# Altium PCB IowaStateLED.PcbDoc
Units mil, origin at the board's own origin, x right, y up, seen from the top; angles counter-clockwise.
Board outline 4580 x 3115 mil, 2 copper layers (Top Layer, Bottom Layer); 178 components, 106 nets, 374 pads, 35 vias.
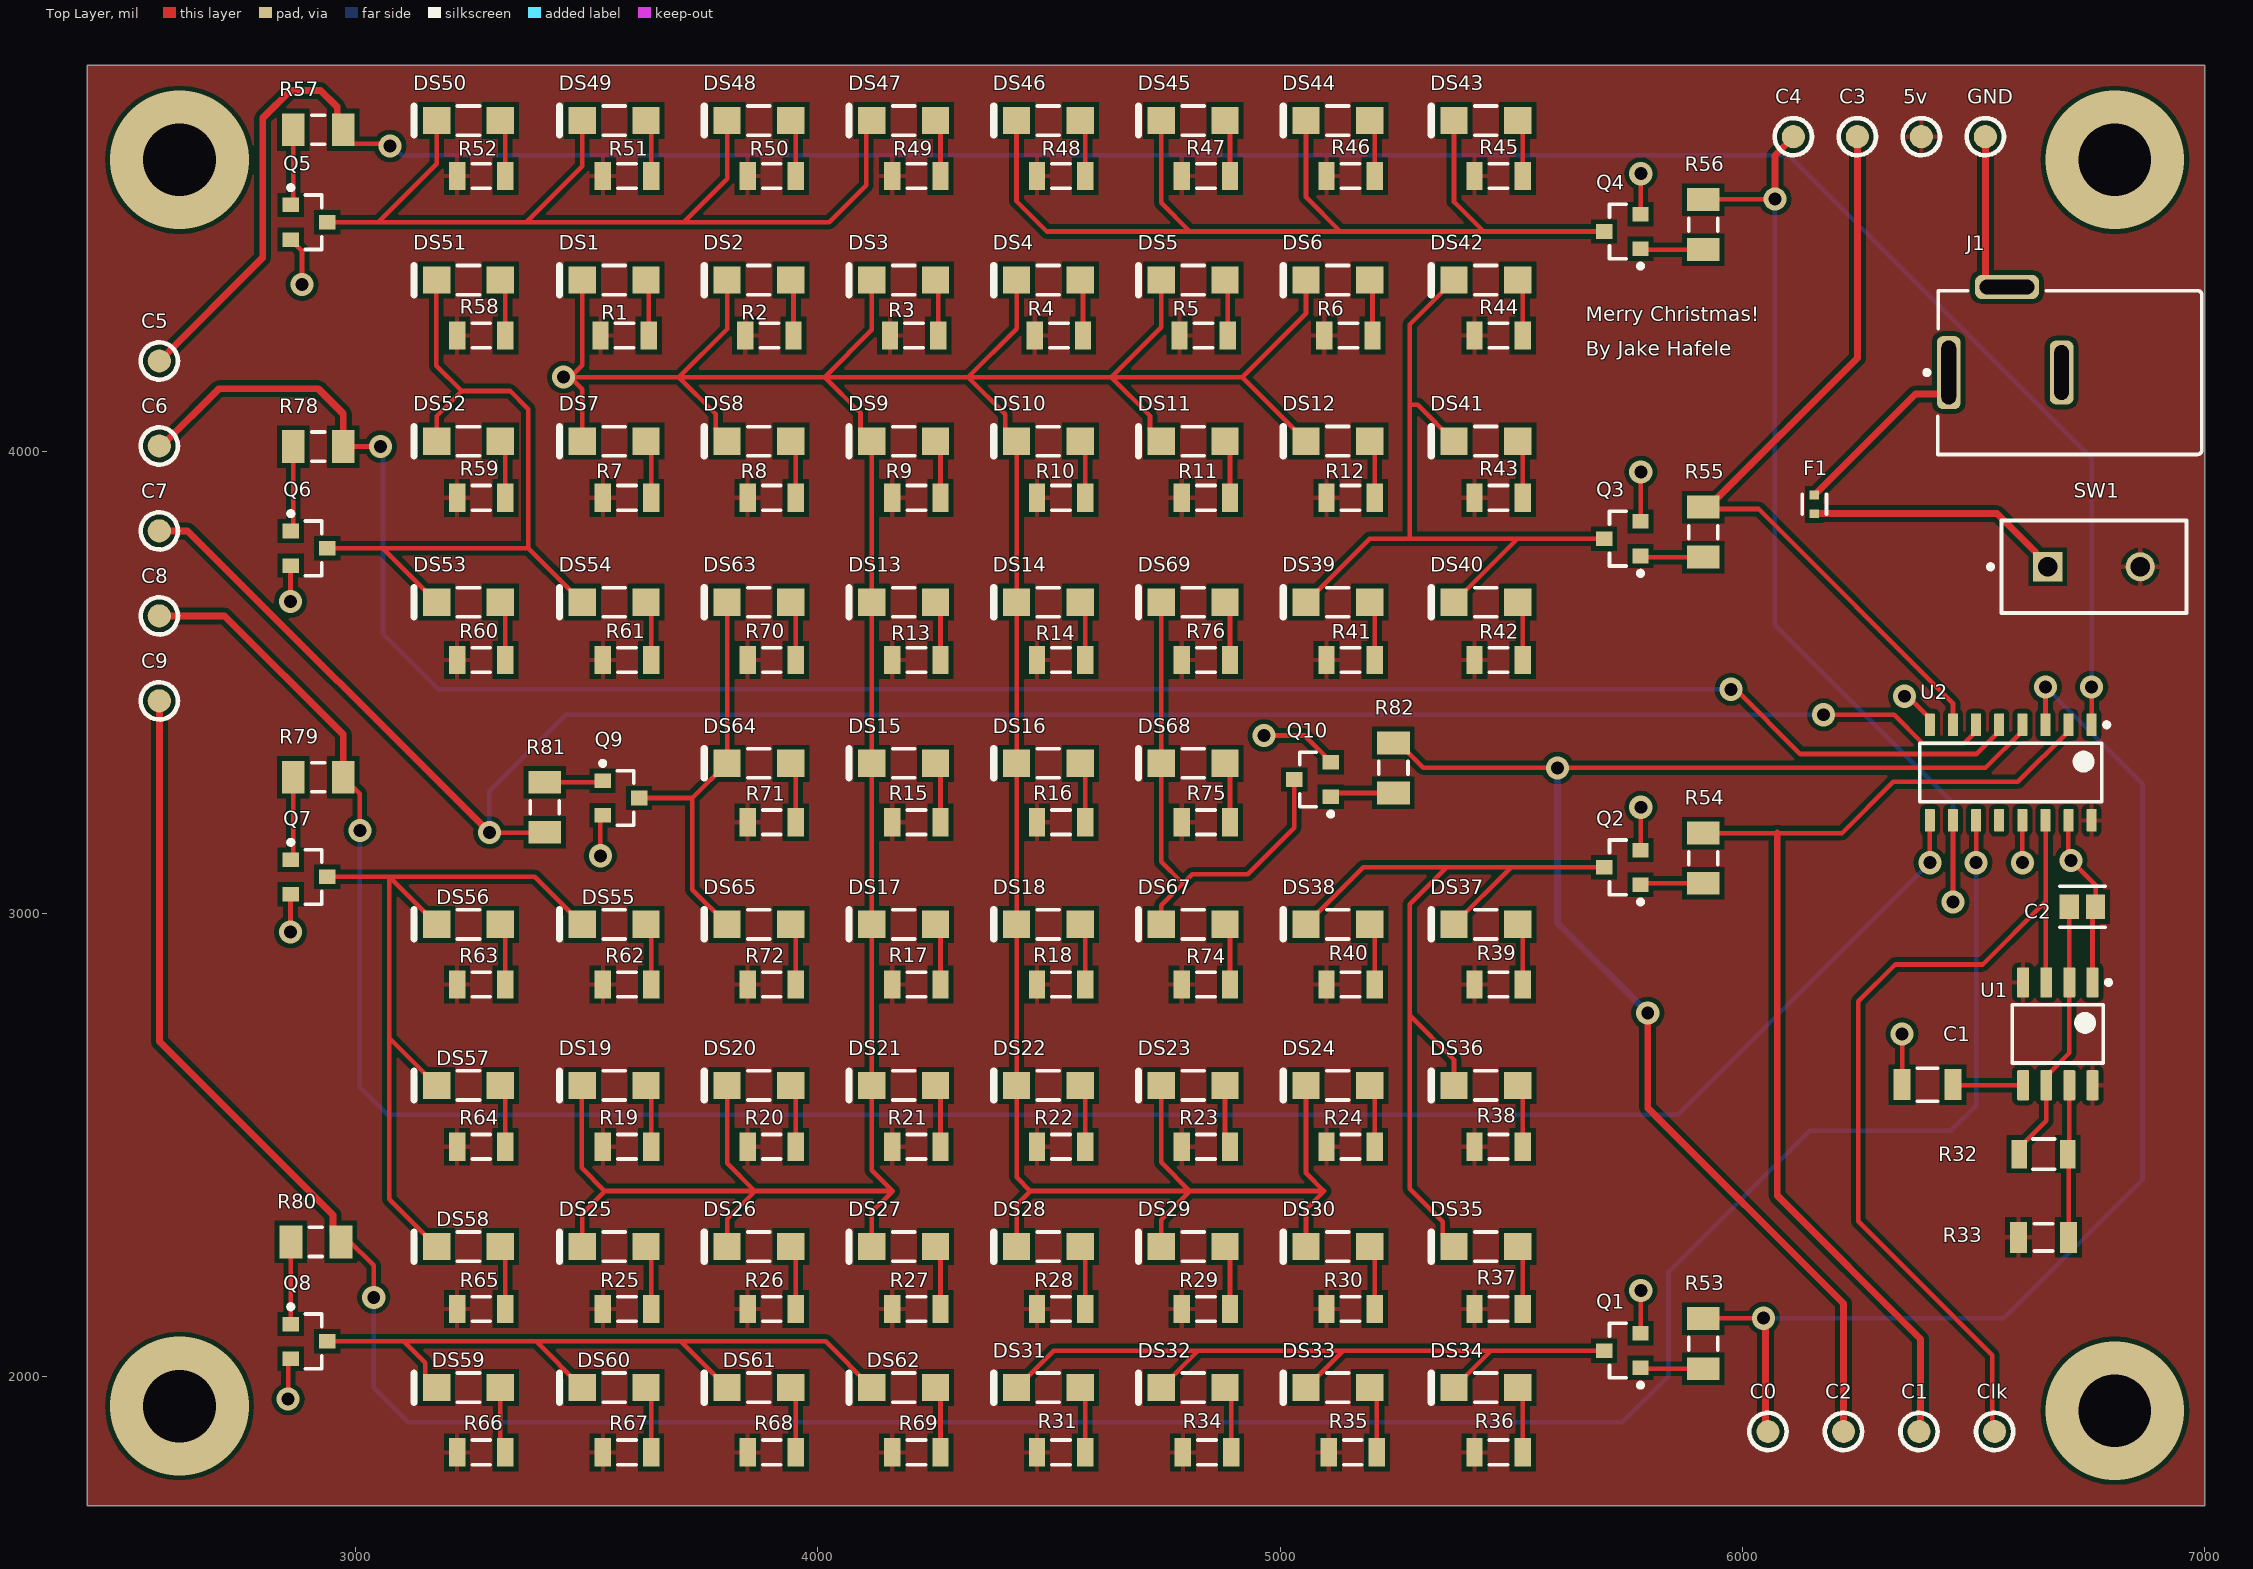
[diagram p0: Top Layer view]
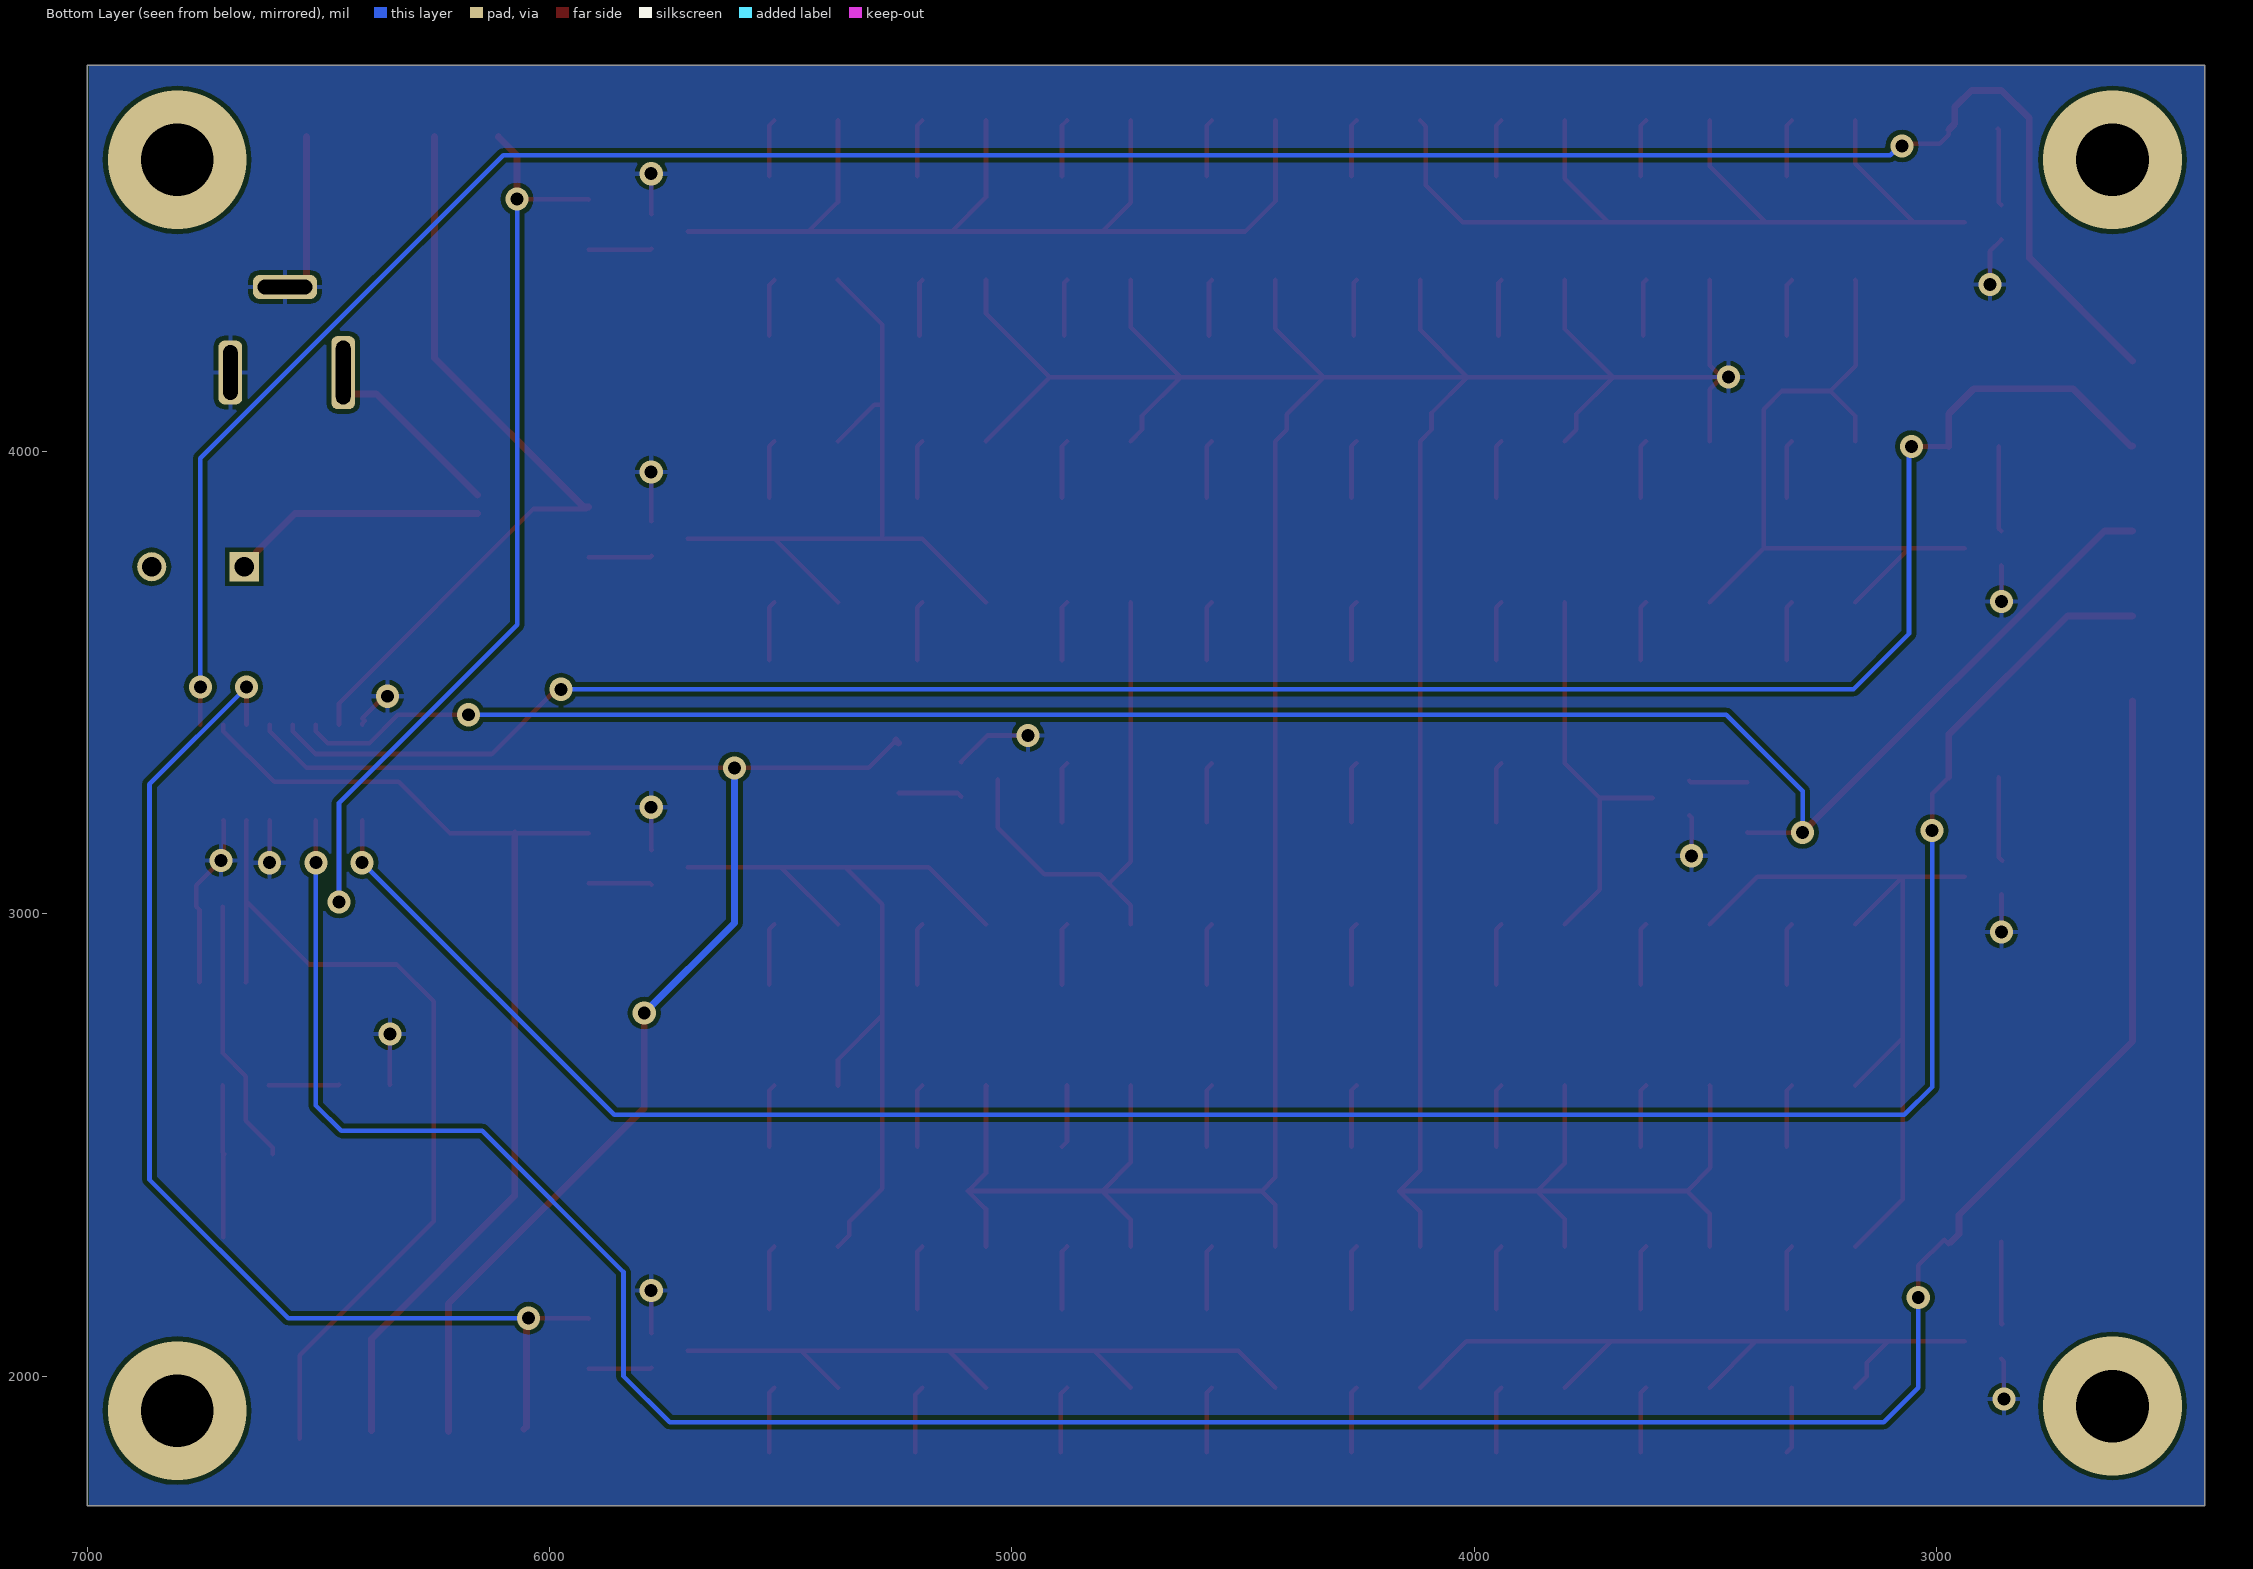
[diagram p1: Bottom Layer view, seen from below]

## Layer stack, top to bottom
Top Solder: solder mask 0.4, Solder Resist, Dk 3.5
Top Layer: signal copper 1.4
Dielectric 1: dielectric 12.6, FR-4, Dk 4.8
Bottom Layer: signal copper 1.4
Bottom Solder: solder mask 0.4, Solder Resist, Dk 3.5

## Board outline
2420,2680 2420,4010 2420,4835 7000,4835 7000,1720 2420,1720

## Design rules (kind name [scope] priority, off if disabled: settings)
Clearance [All] p1: gap=10 ignorepadtopadclearanceinfootprint=FALSE except(0: Arc-Hole Track-Hole SMDPad-Hole THPad-Hole Via-Hole Fill-Hole Poly-Hole Region-Hole Text-Hole)
PolygonConnect [All] p1: connectstyle=Relief reliefconductorwidth=10 reliefentries=4 polygonreliefangle="90 Angle" airgapwidth=10
RoutingVias [All] p1: holewidth=28 width=50 viastyle="Through Hole" minholewidth=28 minwidth=50 maxholewidth=28 maxwidth=50
SolderMaskExpansion [All] p1: expansion=4 istentingtop=FALSE
Width [All] p1: maxlimit=15 minlimit=10 preferedwidth=15 minimp=50.000000 maximp=50.000000 favimp=50.000000
30 further rules are at their usual default settings.

## Classes and differential pairs
component class IowaStateLEDSch: 5v C0 C1 C2 C3 C4 C5 C6 C7 C8 C9 Clk DS31 DS32 DS33 DS34 DS35 DS36 DS37 DS38 DS39 DS40 DS41 DS42 DS43 DS44 DS45 DS46 DS47 DS48 DS49 DS50 DS51 DS52 DS53 DS54 DS55 DS56 DS57 DS58 DS59 DS60 DS61 DS62 DS63 DS64 DS65 DS67 DS68 DS69 F1 GND J1 Q1 Q2 Q3 Q4 Q5 Q6 Q7 Q8 Q9 Q10 R31 R32 R33 R34 R35 R36 R37 R38 R39 R40 R41 R42 R43 R44 R45 R46 R47 R48 R49 R50 R51 R52 R53 R54 R55 R56 R57 R58 R59 R60 R61 R62 R63 R64 R65 R66 R67 R68 R69 R70 R71 R72 R74 R75 R76 R78 R79 R80 R81 R82 SW1 U1 U2
component class ConstantLED: DS1 DS2 DS3 DS4 DS5 DS6 DS7 DS8 DS9 DS10 DS11 DS12 DS13 DS14 DS15 DS16 DS17 DS18 DS19 DS20 DS21 DS22 DS23 DS24 DS25 DS26 DS27 DS28 DS29 DS30 R1 R2 R3 R4 R5 R6 R7 R8 R9 R10 R11 R12 R13 R14 R15 R16 R17 R18 R19 R20 R21 R22 R23 R24 R25 R26 R27 R28 R29 R30

## Components (designator, comment, footprint, x,y, rotation, side; value= is the part's Value field where it differs from the comment)
5v "EPAD" EPAD 6386.67,4680 r0 top
C0 "EPAD" EPAD 6055,1880 r0 top
C1 "EPAD" EPAD 6381.67,1880 r0 top
C1 "0.01 uf" FP-C1206C-EB-MFG 6400,2630 r180 top value="10,000 pF"
C2 "EPAD" EPAD 6218.33,1880 r0 top
C2 "10 uf" FP-CL21-IPC_C 6735,3015 r0 top
C3 "EPAD" EPAD 6248.33,4680 r0 top
C4 "EPAD" EPAD 6110,4680 r0 top
C5 "EPAD" EPAD 2576.31,4195 r0 top
C6 "EPAD" EPAD 2576.31,4011.25 r0 top
C7 "EPAD" EPAD 2576.31,3827.5 r0 top
C8 "EPAD" EPAD 2576.31,3643.75 r0 top
C9 "EPAD" EPAD 2576.31,3460 r0 top
Clk "EPAD" EPAD 6545,1880 r0 top
DS1 "LTST-C150KRKT" LTST-C150KRKT_V 3560,4370 r180 top
DS2 "LTST-C150KRKT" LTST-C150KRKT_V 3873,4370 r180 top
DS3 "LTST-C150KRKT" LTST-C150KRKT_V 4186,4370 r180 top
DS4 "LTST-C150KRKT" LTST-C150KRKT_V 4499,4370 r180 top
DS5 "LTST-C150KRKT" LTST-C150KRKT_V 4812,4370 r180 top
DS6 "LTST-C150KRKT" LTST-C150KRKT_V 5125,4370 r180 top
DS7 "LTST-C150KRKT" LTST-C150KRKT_V 3560,4021.67 r180 top
DS8 "LTST-C150KRKT" LTST-C150KRKT_V 3873,4021.67 r180 top
DS9 "LTST-C150KRKT" LTST-C150KRKT_V 4186,4021.67 r180 top
DS10 "LTST-C150KRKT" LTST-C150KRKT_V 4499,4021.67 r180 top
DS11 "LTST-C150KRKT" LTST-C150KRKT_V 4812,4021.67 r180 top
DS12 "LTST-C150KRKT" LTST-C150KRKT_V 5125,4021.67 r180 top
DS13 "LTST-C150KRKT" LTST-C150KRKT_V 4186,3673.33 r180 top
DS14 "LTST-C150KRKT" LTST-C150KRKT_V 4499,3673.33 r180 top
DS15 "LTST-C150KRKT" LTST-C150KRKT_V 4186,3325 r180 top
DS16 "LTST-C150KRKT" LTST-C150KRKT_V 4499,3325 r180 top
DS17 "LTST-C150KRKT" LTST-C150KRKT_V 4186,2976.67 r180 top
DS18 "LTST-C150KRKT" LTST-C150KRKT_V 4499,2976.67 r180 top
DS19 "LTST-C150KRKT" LTST-C150KRKT_V 3560,2628.33 r180 top
DS20 "LTST-C150KRKT" LTST-C150KRKT_V 3873,2628.33 r180 top
DS21 "LTST-C150KRKT" LTST-C150KRKT_V 4186,2628.33 r180 top
DS22 "LTST-C150KRKT" LTST-C150KRKT_V 4499,2628.33 r180 top
DS23 "LTST-C150KRKT" LTST-C150KRKT_V 4812,2628.33 r180 top
DS24 "LTST-C150KRKT" LTST-C150KRKT_V 5125,2628.33 r180 top
DS25 "LTST-C150KRKT" LTST-C150KRKT_V 3560,2280 r180 top
DS26 "LTST-C150KRKT" LTST-C150KRKT_V 3873,2280 r180 top
DS27 "LTST-C150KRKT" LTST-C150KRKT_V 4186,2280 r180 top
DS28 "LTST-C150KRKT" LTST-C150KRKT_V 4499,2280 r180 top
DS29 "LTST-C150KRKT" LTST-C150KRKT_V 4812,2280 r180 top
DS30 "LTST-C150KRKT" LTST-C150KRKT_V 5125,2280 r180 top
DS31 "Y LED" LTST-C150KSKT_V 4499,1975 r180 top
DS32 "Y LED" LTST-C150KSKT_V 4812,1975 r180 top
DS33 "Y LED" LTST-C150KSKT_V 5125,1975 r180 top
DS34 "Y LED" LTST-C150KSKT_V 5445,1975 r180 top
DS35 "Y LED" LTST-C150KSKT_V 5445,2280 r180 top
DS36 "Y LED" LTST-C150KSKT_V 5445,2628.33 r180 top
DS37 "Y LED" LTST-C150KSKT_V 5445,2976.66 r180 top
DS38 "Y LED" LTST-C150KSKT_V 5125,2976.66 r180 top
DS39 "Y LED" LTST-C150KSKT_V 5125,3673.33 r180 top
DS40 "Y LED" LTST-C150KSKT_V 5445,3673.33 r180 top
DS41 "Y LED" LTST-C150KSKT_V 5445,4021.66 r180 top
DS42 "Y LED" LTST-C150KSKT_V 5445,4370 r180 top
DS43 "Y LED" LTST-C150KSKT_V 5445,4715 r180 top
DS44 "Y LED" LTST-C150KSKT_V 5125,4715 r180 top
DS45 "Y LED" LTST-C150KSKT_V 4812,4715 r180 top
DS46 "Y LED" LTST-C150KSKT_V 4499,4715 r180 top
DS47 "Y LED" LTST-C150KSKT_V 4186,4715 r180 top
DS48 "Y LED" LTST-C150KSKT_V 3873,4715 r180 top
DS49 "Y LED" LTST-C150KSKT_V 3560,4715 r180 top
DS50 "Y LED" LTST-C150KSKT_V 3245,4715 r180 top
DS51 "Y LED" LTST-C150KSKT_V 3245,4370 r180 top
DS52 "Y LED" LTST-C150KSKT_V 3245,4021.66 r180 top
DS53 "Y LED" LTST-C150KSKT_V 3245,3673.33 r180 top
DS54 "Y LED" LTST-C150KSKT_V 3560,3673.33 r180 top
DS55 "Y LED" LTST-C150KSKT_V 3560,2976.66 r180 top
DS56 "Y LED" LTST-C150KSKT_V 3245,2976.66 r180 top
DS57 "Y LED" LTST-C150KSKT_V 3245,2628.33 r180 top
DS58 "Y LED" LTST-C150KSKT_V 3245,2280 r180 top
DS59 "Y LED" LTST-C150KSKT_V 3245,1975 r180 top
DS60 "Y LED" LTST-C150KSKT_V 3560,1975 r180 top
DS61 "Y LED" LTST-C150KSKT_V 3873,1975 r180 top
DS62 "Y LED" LTST-C150KSKT_V 4186,1975 r180 top
DS63 "Y LED" LTST-C150KSKT_V 3873,3673.33 r180 top
DS64 "Y LED" LTST-C150KSKT_V 3873,3325 r180 top
DS65 "Y LED" LTST-C150KSKT_V 3873,2976.66 r180 top
DS67 "Y LED" LTST-C150KSKT_V 4812,2976.66 r180 top
DS68 "Y LED" LTST-C150KSKT_V 4812,3325 r180 top
DS69 "Y LED" LTST-C150KSKT_V 4812,3673.33 r180 top
F1 "ERB-RD2R00X" FP-ERBRD-MFG 6155,3885 r270 top value=53mΩ
GND "EPAD" EPAD 6525,4680 r0 top
J1 "Barrel Jack" KYCN-KLDX-0202-A_V 6690,4170 r0 top
Q1 "NPN" DIOD-SOT23-3_V 5740,2055 r180 top
Q2 "NPN" DIOD-SOT23-3_V 5740,3100 r180 top
Q3 "NPN" DIOD-SOT23-3_V 5740,3810.67 r180 top
Q4 "NPN" DIOD-SOT23-3_V 5740,4475 r180 top
Q5 "NPN" DIOD-SOT23-3_V 2900,4495 r0 top
Q6 "NPN" DIOD-SOT23-3_V 2900,3790 r0 top
Q7 "NPN" DIOD-SOT23-3_V 2900,3079.33 r0 top
Q8 "NPN" DIOD-SOT23-3_V 2900,2075 r0 top
Q9 "NPN" DIOD-SOT23-3_V 3574.44,3250 r0 top
Q10 "NPN" DIOD-SOT23-3_V 5070,3290 r180 top
R1 "110 Res" RESC3216X70X50LL05T20 3582.56,4250 r0 top
R2 "110 Res" RESC3216X70X50LL05T20 3895.56,4250 r0 top
R3 "110 Res" RESC3216X70X50LL05T20 4208.56,4250 r0 top
R4 "110 Res" RESC3216X70X50LL05T20 4521.56,4250 r0 top
R5 "110 Res" RESC3216X70X50LL05T20 4834.56,4250 r0 top
R6 "110 Res" RESC3216X70X50LL05T20 5147.56,4250 r0 top
R7 "110 Res" RESC3216X70X50LL05T20 3587.56,3899.17 r0 top
R8 "110 Res" RESC3216X70X50LL05T20 3900.56,3899.17 r0 top
R9 "110 Res" RESC3216X70X50LL05T20 4213.56,3899.17 r0 top
R10 "110 Res" RESC3216X70X50LL05T20 4526.56,3899.17 r0 top
R11 "110 Res" RESC3216X70X50LL05T20 4839.56,3899.17 r0 top
R12 "110 Res" RESC3216X70X50LL05T20 5152.56,3899.17 r0 top
R13 "110 Res" RESC3216X70X50LL05T20 4213.56,3548.33 r0 top
R14 "110 Res" RESC3216X70X50LL05T20 4526.56,3548.33 r0 top
R15 "110 Res" RESC3216X70X50LL05T20 4213.56,3197.5 r0 top
R16 "110 Res" RESC3216X70X50LL05T20 4526.56,3197.5 r0 top
R17 "110 Res" RESC3216X70X50LL05T20 4213.56,2846.67 r0 top
R18 "110 Res" RESC3216X70X50LL05T20 4526.56,2846.67 r0 top
R19 "110 Res" RESC3216X70X50LL05T20 3587.56,2495.83 r0 top
R20 "110 Res" RESC3216X70X50LL05T20 3900.56,2495.83 r0 top
R21 "110 Res" RESC3216X70X50LL05T20 4213.56,2495.83 r0 top
R22 "110 Res" RESC3216X70X50LL05T20 4526.56,2495.83 r0 top
R23 "110 Res" RESC3216X70X50LL05T20 4839.56,2495.83 r0 top
R24 "110 Res" RESC3216X70X50LL05T20 5152.56,2495.83 r0 top
R25 "110 Res" RESC3216X70X50LL05T20 3587.56,2145 r0 top
R26 "110 Res" RESC3216X70X50LL05T20 3900.56,2145 r0 top
R27 "110 Res" RESC3216X70X50LL05T20 4213.56,2145 r0 top
R28 "110 Res" RESC3216X70X50LL05T20 4526.56,2145 r0 top
R29 "110 Res" RESC3216X70X50LL05T20 4839.56,2145 r0 top
R30 "110 Res" RESC3216X70X50LL05T20 5152.56,2145 r0 top
R31 "110 Res" RESC3216X70X50LL05T20 4526.56,1835 r0 top
R32 "1k" FP-CR1206-IPC_C 6650.92,2480 r0 top
R33 "150k" RESC3216X70X40LL20T20 6650.87,2300 r0 top
R34 "110 Res" RESC3216X70X50LL05T20 4841.89,1835 r0 top
R35 "110 Res" RESC3216X70X50LL05T20 5157.22,1835 r0 top
R36 "110 Res" RESC3216X70X50LL05T20 5472.56,1835 r0 top
R37 "110 Res" RESC3216X70X50LL05T20 5472.56,2145 r0 top
R38 "110 Res" RESC3216X70X50LL05T20 5472.56,2495.83 r0 top
R39 "110 Res" RESC3216X70X50LL05T20 5472.56,2846.67 r0 top
R40 "110 Res" RESC3216X70X50LL05T20 5152.56,2846.67 r0 top
R41 "110 Res" RESC3216X70X50LL05T20 5152.56,3548.33 r0 top
R42 "110 Res" RESC3216X70X50LL05T20 5472.56,3548.33 r0 top
R43 "110 Res" RESC3216X70X50LL05T20 5472.56,3899.17 r0 top
R44 "110 Res" RESC3216X70X50LL05T20 5472.56,4250 r0 top
R45 "110 Res" RESC3216X70X50LL05T20 5472.56,4595 r0 top
R46 "110 Res" RESC3216X70X50LL05T20 5152.56,4595 r0 top
R47 "110 Res" RESC3216X70X50LL05T20 4839.56,4595 r0 top
R48 "110 Res" RESC3216X70X50LL05T20 4526.56,4595 r0 top
R49 "110 Res" RESC3216X70X50LL05T20 4213.56,4595 r0 top
R50 "110 Res" RESC3216X70X50LL05T20 3900.56,4595 r0 top
R51 "110 Res" RESC3216X70X50LL05T20 3587.56,4595 r0 top
R52 "110 Res" RESC3216X70X50LL05T20 3272.56,4595 r0 top
R53 "10k" RESC3116X65X50NL20T20 5915,2070 r270 top
R54 "10k" RESC3116X65X50NL20T20 5915,3120 r270 top
R55 "10k" RESC3116X65X50NL20T20 5915,3825 r270 top
R56 "10k" RESC3116X65X50NL20T20 5915,4490 r270 top
R57 "10k" RESC3116X65X50NL20T20 2920,4695 r180 top
R58 "110 Res" RESC3216X70X50LL05T20 3272.56,4250 r0 top
R59 "110 Res" RESC3216X70X50LL05T20 3272.56,3899.17 r0 top
R60 "110 Res" RESC3216X70X50LL05T20 3272.56,3548.33 r0 top
R61 "110 Res" RESC3216X70X50LL05T20 3587.56,3548.33 r0 top
R62 "110 Res" RESC3216X70X50LL05T20 3587.56,2846.67 r0 top
R63 "110 Res" RESC3216X70X50LL05T20 3272.56,2846.67 r0 top
R64 "110 Res" RESC3216X70X50LL05T20 3272.56,2495.83 r0 top
R65 "110 Res" RESC3216X70X50LL05T20 3272.56,2145 r0 top
R66 "110 Res" RESC3216X70X50LL05T20 3272.56,1835 r0 top
R67 "110 Res" RESC3216X70X50LL05T20 3587.56,1835 r0 top
R68 "110 Res" RESC3216X70X50LL05T20 3900.56,1835 r0 top
R69 "110 Res" RESC3216X70X50LL05T20 4213.56,1835 r0 top
R70 "110 Res" RESC3216X70X50LL05T20 3900.56,3548.33 r0 top
R71 "110 Res" RESC3216X70X50LL05T20 3900.56,3197.5 r0 top
R72 "110 Res" RESC3216X70X50LL05T20 3900.56,2846.67 r0 top
R74 "110 Res" RESC3216X70X50LL05T20 4839.56,2846.67 r0 top
R75 "110 Res" RESC3216X70X50LL05T20 4839.56,3197.5 r0 top
R76 "110 Res" RESC3216X70X50LL05T20 4839.56,3548.33 r0 top
R78 "10k" RESC3116X65X50NL20T20 2920,4010 r180 top
R79 "10k" RESC3116X65X50NL20T20 2920,3295 r180 top
R80 "10k" RESC3116X65X50NL20T20 2915,2290 r180 top
R81 "10k" RESC3116X65X50NL20T20 3410,3230 r90 top
R82 "10k" RESC3116X65X50NL20T20 5245,3315 r270 top
SW1 "TS02CBE" CKCP-TS02CBE_V 6760,3750 r0 top
U1 "Pulse Timer" D0008A_M 6681.71,2740 r270 top
U2 "Counter" D0016A_L 6580,3305 r270 top

## Footprints (in the part's own frame and the unit in brackets; to place one, negate y for a bottom-side part, rotate by r counter-clockwise, add the part's x,y. Pads: shape width x height; smd on the part's side, far side on the other; paste and mask are expansions set on the pad)
CKCP-TS02CBE_V [mm] "THD, 2-Leads, Body 10.16x5.08mm"
  rect 1.6x1.6 hole 1.09: 1(-2.54,0)
  round 1.6 hole 1.09: 3(2.54,0)
  silkscreen extent -5.8,-2.54 5.08,2.54, body extent -5.08,-2.54 5.08,2.54, height 12.93
D0008A_M [mm] "SOIC, 8-Leads, Body 5x4mm, Pitch 1.27mm, IPC Low Density"
  rrect15% 1.65x0.65 smd: 1(-2.825,1.905) 2(-2.825,0.635) 3(-2.825,-0.635) 4(-2.825,-1.905) 5(2.825,-1.905) 6(2.825,-0.635) 7(2.825,0.635) 8(2.825,1.905)
  silkscreen extent -2.95,-2.5 1.6,2.91, body extent -3,-2.45 3,2.45, height 1.63
D0016A_L [mm] "SOIC, 16-Leads, Body 10x4mm, Pitch 1.27mm, IPC High Density"
  rrect18% 1.25x0.55 smd: 1(-2.625,4.445) 2(-2.625,3.175) 3(-2.625,1.905) 4(-2.625,0.635) 5(-2.625,-0.635) 6(-2.625,-1.905) 7(-2.625,-3.175) 8(-2.625,-4.445) 9(2.625,-4.445) 10(2.625,-3.175) 11(2.625,-1.905) 12(2.625,-0.635) 13(2.625,0.635) 14(2.625,1.905) 15(2.625,3.175) 16(2.625,4.445)
  silkscreen extent -2.75,-5 1.6,5.4, body extent -3,-4.95 3,4.95, height 1.59
DIOD-SOT23-3_V [mm] "SOT23, 3-Leads, Body 3x1.4mm, Pitch 0.95mm"
  rect 0.9x0.8 smd: 1(-1,0.95) 2(-1,-0.95) 3(1,0)
  silkscreen extent -1.13,-1.5 0.7,2.02, body extent -1.25,-1.5 1.25,1.5, height 1.1
EPAD [mil]
  round 50 smd: 1(0,0)
  silkscreen extent -40,-40 40,40
FP-C1206C-EB-MFG [mm]
  rect 0.95x1.7 smd paste+0 mask+0: 1(-1.4,0) 2(1.4,0)
  silkscreen extent -0.55,-0.9 0.55,0.9, body extent -2,-1 2,1, height 0.25
FP-CL21-IPC_C [mil]
  rect 41.52x53.39 smd paste+0 mask+0: 1(-28.57,0) 2(28.57,0)
  silkscreen extent -49,-44 49,44, body extent -53,-32 53,32, height 10
FP-CR1206-IPC_C [mil]
  rect 33.79x61.5 smd paste+0 mask+0: 1(-52.24,0) 2(52.24,0)
  silkscreen extent -24,-32 24,32, body extent -73,-36 73,36, height 10
FP-ERBRD-MFG [mm]
  rect 0.475x0.5 smd paste+0 mask+0: 1(-0.512,0) 2(0.513,0)
  silkscreen extent -0.56,-0.67 0.55,0.67, body extent -0.85,-0.4 0.85,0.4, height 0.25
KYCN-KLDX-0202-A_V [mm] "Power Jack, 3-Leads, Body 14.5x9mm"
  rrect50% 1.3x4 hole 0.8 slot 3.5 at 90 deg: 1(-6.2,0)
  rrect50% 1.3x3.5 hole 0.8 slot 3 at 90 deg: 2(0,0)
  rrect50% 3.5x1.3 hole 0.8 slot 3 at 0 deg: 3(-3,4.7)
  silkscreen extent -7.52,-4.5 7.7,4.5, body extent -6.8,-4.5 7.7,4.9, height 10.8
LTST-C150KRKT_V [mm] "SMD, 2-Leads, Body 3.2x1.6mm"
  rect 1.5x1.5 smd: 1(-1.75,0) 2(1.75,0)
  silkscreen extent -0.6,-0.8 3,0.8, body extent -1.6,-0.8 1.6,0.8, height 1.2
LTST-C150KSKT_V [mm] "SMD, 2-Leads, Body 3.2x1.6mm"
  rect 1.5x1.5 smd: 1(-1.75,0) 2(1.75,0)
  silkscreen extent -0.6,-0.8 3,0.8, body extent -1.6,-0.8 1.6,0.8, height 1.2
RESC3116X65X50NL20T20 [mm] "Chip Resistor, 2-Leads, Body 3.10x1.60mm, IPC Medium Density"
  rect 1.25x1.8 smd: 1(-1.375,0) 2(1.375,0)
  silkscreen extent -0.35,-0.8 0.35,0.8, body extent -1.65,-0.9 1.65,0.9, height 0.65
RESC3216X70X40LL20T20 [mm] "Chip Resistor, 2-Leads, Body 3.20x1.60mm, IPC High Density"
  rect 0.95x1.7 smd: 1(-1.375,0) 2(1.375,0)
  silkscreen extent -0.5,-0.75 0.5,0.75, body extent -1.7,-0.9 1.7,0.9, height 0.7
RESC3216X70X50LL05T20 [mm] "Chip Resistor, 2-Leads, Body 3.20x1.60mm, IPC High Density"
  rect 0.9x1.55 smd: 1(-1.325,0) 2(1.325,0)
  silkscreen extent -0.5,-0.67 0.5,0.67, body extent -1.63,-0.82 1.62,0.82, height 0.7

## Part data
5v C0 C1 C2 C3 C4 C5 C6 C7 C8 C9 Clk GND: "Pad for probing signals"
C1: library part CMP-03020-025386-1, "C1206 10,000 pF X7R 10.00% 50 V", Capacitance="10,000 pF", Manufacturer=KEMET, Manufacturer Part Number=C1206C103K5RAC, Package=C1206C-EB, Temperature="-55°C to +150°C", Temperature Characteristic=X7R, Temperature Coefficient=15%, Temperature Range High=+150°C, Temperature Range Low=-55°C, Tolerance=0.1, Voltage Rating="50 V", Automotive=Yes, Automotive Grade="Grade 0", Category=Cap, ComponentLink2Description=Datasheet, ComponentLink2URL=https://content.kemet.com/datasheets/KEM_C1007_X8R_ULTRA_150C_SMD.pdf, Device Class L1="Passive Components", Device Class L2=Capacitors, Device Class L3="Ceramic Capacitors", Height=0.88mm, Ipc Land Pattern Name=CAPC320160X78, Lead Free=Yes, Material=Ceramic, Mouser Description="Cap Ceramic 0.01uF 50V X7R 10% Pad SMD 1206 125C Bulk", Octopart=https://octopart.com/c1206c103k5rac-kemet-1311444, RoHS=TRUE
C2: library part CMP-13271-001427-1, "CL21 Series 0805 10uF 6.3V ±10% Tolerance X7R Multilayer Ceramic Chip Capacitor", Capacitance=10uF, Case Code (Imperial)=0805, Case Code (Metric)=2012, Dielectric=X7R, Max Operating Temperature=125°C, Min Operating Temperature=-55°C, Package Quantity=3000, Tolerance=10%, Voltage=6.3V, Case/Package=0805, ComponentLink1Description="Digikey order", ComponentLink1URL=https://www.digikey.com/en/products/detail/CL21B106KQQNNNG/1276-6474-1-ND/5958102?utm_campaign=buynow&utm_medium=aggregator&curr=usd&utm_source=octopart, Depth=1.25mm, Height=1.25mm, Lead Free="Lead Free", Length=2mm, Mount="Surface Mount", Packaging="Tape and Reel", Thickness=0.055inch, Voltage Rating=6.3V, Width=0.049inch
DS1 DS2 DS3 DS4 DS5 DS6 DS7 DS8 DS9 DS10 DS11 DS12 DS13 DS14 DS15 DS16 DS17 DS18 DS19 DS20 DS21 DS22 DS23 DS24 DS25 DS26 DS27 DS28 DS29 DS30: library part CMP-2000-06617-1, "LED Red, 62.5 mW, 50 mA, -30 to 85 degC, 2-Pin SMD, RoHS, Tape and Reel", Emitting Color=Red, Forward Current=30mA, Forward Voltage=2.4V, Manufacturer=Lite-On, Operating Temp Range=-55Cto85C, Operating Temperature Classification=Industrial, Package Description="2-Pin Surface Mount Device, Body 3.2 x 1.6 mm", Package Reference=C150KRKT, Package Type=ChipLed, Power Dissipation=75W, Reverse Voltage=5V, Test Current (It)=20mA, Chip Material=AlGaInP, Datasheet URL=http://optoelectronics.liteon.com/upload/download/DS-22-99-0149/S_110_LTST-C150KRKT.pdf, Datasheet Version="Rev. C, 01/2013", DELETED=Compliant, Dominant Wave Length=631nm, High Brightness=Yes, Lens Dimensions=2.06X1.6X0.6mm, Lum Intensity=54mcd, Luminous Intensity=54mcd, Main Category=ChipLED, Manufacturer URL=http://www.us.liteon.com/, Mounting=SurfaceMount, Mounting Technology=SurfaceMount, Number of  Elements=1, Packaging=TapeandReel, Peak Wavelength=639nm, Pin Count=2, Product Depth (mm)=1.6mm, Product Height (mm)=1.1mm, Product Length (mm)=3.2mm, Rad Hardened=No, Shape Type=Rectangular, Type=Uni-Color, Viewing Angle=130deg
DS31 DS32 DS33 DS34 DS35 DS36 DS37 DS38 DS39 DS40 DS41 DS42 DS43 DS44 DS45 DS46 DS47 DS48 DS49 DS50 DS51 DS52 DS53 DS54 DS55 DS56 DS57 DS58 DS59 DS60 DS61 DS62 DS63 DS64 DS65 DS67 DS68 DS69: library part CMP-2000-06618-1, "LED Yellow, 75 mW, 80 mA, -55 to 85 degC, 2-Pin SMD, RoHS, Tape and Reel", Emitting Color=Amber, Forward Current=30mA, Forward Voltage=2.4V, Manufacturer=Lite-On, Operating Temp Range=-55Cto85C, Operating Temperature Classification=Industrial, Package Description="2-Pin Surface Mount Device, Body 3.2 x 1.6 mm", Package Reference=C150KSKT, Package Type=ChipLed, Power Dissipation=75W, Reverse Voltage=5V, Test Current (It)=20mA, Chip Material=AlGaInP, Datasheet URL=http://optoelectronics.liteon.com/upload/download/DS-22-99-0187/S_110_LTST-C150KSKT.pdf, Datasheet Version="Rev. E, 02/2005", DELETED=Compliant, Dominant Wave Length=587nm, High Brightness=Yes, Lens Dimensions=2.06X1.6X0.6mm, Lum Intensity=60mcd, Luminous Intensity=60mcd, Main Category=ChipLED, Manufacturer URL=http://www.us.liteon.com/, Mounting=SurfaceMount, Mounting Technology=SurfaceMount, Number of  Elements=1, Packaging=TapeandReel, Peak Wavelength=588nm, Pin Count=2, Product Depth (mm)=1.6mm, Product Height (mm)=1.1mm, Product Length (mm)=3.2mm, Rad Hardened=No, Shape Type=Rectangular, Type=Uni-Color, Viewing Angle=130deg
F1: library part CMP-05590-000001-1, "FUSE BOARD MOUNT 2A 32VDC 0402", Fuse Current=2A, Fuse Interrupt Dc Current=35A, Manufacturer="Panasonic Electronic Components", Max Fuse Dc Voltage=32V, Package=ERBRD, Resistance=53mΩ, Temperature="-40°C to +125°C", Temperature Range High=+125°C, Temperature Range Low=-40°C, Automotive=No, Category=Fuse, ComponentLink2Description=Datasheet, ComponentLink2URL=https://industrial.panasonic.com/cdbs/www-data/pdf/AFA0000/AFA0000C7.pdf, Device Class L1="Circuit Protection", Device Class L2=Fuses, Device Class L3=unset, Digikey Description="FUSE BOARD MOUNT 2A 32VDC 0402", Fuse Blow Speed=Fast, Height=0.49mm, Lead Free=Yes, Manufacturer Part Number=ERB-RD2R00X, Mouser Description="Surface Mount Fuses 2A 0402 micro chip", Octopart=https://octopart.com/erb-rd2r00x-panasonic-21220532, RoHS=TRUE, Voltage Rating=32V
J1: library part CMP-1673-00001-5, "DC Power Jack, 24 V, 3.5 A, -25 to 85 degC, 3-Pin THD, RoHS", Colour=Black, Current Rating="3.5 A", Manufacturer=Kycon, Max Operating Temperature="85 degC", Min Operating Temperature="-25 degC", Package Quantity=500, Voltage Rating="24 V", ComponentLink1Description="Manufacturer URL", ComponentLink1URL=http://www.kycon.com/, ComponentLink2Description=Datasheet, ComponentLink2URL=http://www.kycon.com/Pub_Eng_Draw/KLDX-0202-X.PDF, ComponentLink3Description="Wall Adapter", ComponentLink3URL=https://www.digikey.com/en/products/detail/xp-power/VEL05US050-US-JA/5023713, Connector Type=Power, Contact Gender=Female, Contact Material=Brass, Contact Plating=Tin, DatasheetVersion="Rev. D3, 06/2013", Height="10.8 mm", Housing Material=PBT, Length="9.2 mm", Mount="Through Hole", Mounting Technology="Through Hole", PackageDescription="3-Pin Through Hole Device, Body 14.5 x 9 mm", PackageReference=KLDX-0202-A, Pins=2, RoHSCompliant=true
Q1 Q2 Q3 Q4 Q5 Q6 Q7 Q8 Q9 Q10: library part CMP-1693-00003-3, "NPN Small Signal Transistor, 40 V, -55 to 150 degC, 3-Pin SOT23, RoHS, Tape and Reel", Case/Package=SOT-23, Max Operating Temperature="150 degC", Min Operating Temperature="-55 degC", Package Quantity=3000, PartNumber=MMBT2222A-7-F, ComponentLink1Description="Manufacturer URL", ComponentLink1URL=http://www.diodes.com/, ComponentLink2Description=Datasheet, ComponentLink2URL=http://www.diodes.com/_files/datasheets/ds30041.pdf, DatasheetVersion="Rev. 16 - 2", Height="1.1 mm", Length="3 mm", Mount="Surface Mount", Mounting Technology="Surface Mount", PackageDescription="3-Pin Small Outline Transistor, Body 2.9 x 1.3 mm, Pitch 0.95 mm", Packaging="Tape and Reel", Pins=3, Radiation Hardening=No, REACH SVHC="No SVHC", RoHSCompliant=True, Weight="0.000282 oz", Width="1.4 mm"
R1 R2 R3 R4 R5 R6 R7 R8 R9 R10 R11 R12 R13 R14 R15 R16 R17 R18 R19 R20 R21 R22 R23 R24 R25 R26 R27 R28 R29 R30 R31 R34 R35 R36 R37 R38 R39 R40 R41 R42 R43 R44 R45 R46 R47 R48 R49 R50 R51 R52 R58 R59 R60 R61 R62 R63 R64 R65 R66 R67 R68 R69 R70 R71 R72 R74 R75 R76: library part CMP-2003-00040-1, Manufacturer=Panasonic, Part Number=ERJ-8ENF1100V
R32: library part CMP-07231-001820-1, "Thick Film Chip Resistors 1206 1kΩ 0.25W 5% 200ppm/°C", Case Code (Imperial)=1206, Case Code (Metric)=3216, Max Operating Temperature=155°C, Min Operating Temperature=-55°C, Package Quantity=5000, Power Rating=250mW, Resistance=1kR, Temperature Coefficient=200ppm/°C, Tolerance=5%, Voltage Rating=200V, Case/Package=1206, Composition="Thick Film", Contact Plating=Tin, Depth=1.6mm, Height=0.6mm, Length=3.2mm, Military Standard=Not, Mount="Surface Mount", Number of Pins=2, Packaging="Tape and Reel", Radiation Hardening=No, REACH SVHC="No SVHC", Termination=SMD/SMT, Thickness=610um, Voltage Rating (DC)=200V, Width=1.6mm
R33: library part CMP-2003-04546-1, Manufacturer="KOA Speer", Part Number=RK73B2BTTD154J
R53 R54 R55 R56 R57 R78 R79 R80 R81 R82: library part CMP-2003-04883-1, Manufacturer="Vishay Dale", Part Number=CRCW120610K0FKEAHP
SW1: library part CMP-2000-07317-1, "Tiny Slide Switch, SPST, 20 V, -30 to 85 degC, 2-Pin THD, RoHS, Bulk", AC Voltage Rating (Max)=20V, Manufacturer="C&K Components", Operating Temp Range=-30Cto85C, Package Description="2-Pin Through Hole Device, Body 10.16 x 5.08 mm", Actuator Material=Nylon, Actuator Style=TopSlide, Contact Material=CopperAlloy, Contact Plating=Gold/Nickel, Datasheet URL=http://www.ck-components.com/media/1426/ts_12feb16.pdf, Datasheet Version=02/2016, DC Voltage Rating (Max)=20V, Housing Material=N/A/StainlessSteel, Manufacturer URL=http://www.ckswitches.com/, Mounting Style=ThroughHole, Mounting Technology=ThroughHole, Package Reference=TS02CBE, Pole Throw Configuration=SPST, Product Depth (mm)=5.08mm, Product Height (mm)=12.91mm, Product Length (mm)=10.16mm, Switch Configuration=OFFNoneON, Terminal Type=PCPins, Type=Tiny
U1: library part CMP-1685-00007-1, "Precision Timer, 4.5 to 16 V, 0 to 70 degC, 8-Pin SOIC (D8), Green (RoHS & no Sb/Br), Tape and Reel", Case\Package=SMA, Forward Current="1 A", Forward Voltage="450 mV", Max Operating Temperature="125 degC", Max Surge Current="30 A", Min Operating Temperature="-55 degC", Package Quantity=1, Peak Reverse Current="500 uA", Code_JEDEC=MS-012, ComponentLink1Description="Manufacturer URL", ComponentLink1URL=http://www.ti.com/, ComponentLink2Description=Datasheet, ComponentLink2URL=http://www.ti.com/general/docs/lit/getliterature.tsp?genericPartNumber=NE555&fileType=pdf, ComponentLink3Description="Package Specification", ComponentLink3URL=http://www.ti.com/lit/ml/msoi002j/msoi002j.pdf, DatasheetVersion="SLFS022I, 09/2014", Height="2.44 mm", Length="4.57 mm", Mount="Surface Mount", PackageDescription="8-Pin Small Outline Integrated Circuit, Body 4.9 x 3.9 mm, Pitch 1.27 mm", PackageReference=D0008A, PackageVersion="4040047-3/M, 06/2011", Packaging="Cut Tape", Pins=2, Radiation Hardening=No, REACH SVHC=Unknown, RoHSCompliant=true, Width="2.84 mm"
U2: library part CMP-1623-00072-2, "CMOS Decade Counter with 10 Decoded Outputs, D0016A, LARGE T&R", F @ Nom Voltage(Max)(Mhz)=8, Generic Part Number=CD4017B, ICC @ Nom Voltage(Max)(mA)=0.03, Manufacturer="Texas Instruments", Operating Temperature Range(C)="-55 to 125", Rating=Military, tpd @ Nom Voltage(Max)(ns)=270, Voltage(Nom)(V)=10, Bits(#)=10, Code_JEDEC="MS-012 variation AC", DatasheetVersion=SCHS027C, Function=Counter, Input Type=CMOS, Inputs=1, Output Drive (IOL/IOH)(Max)(mA)=1.5/-1.5, Output Type=CMOS, PackageReference=D0016A, Schmitt Trigger=No, Technology Family=CD4000, Type=Decade, VCC(Max)(V)=18, VCC(Min)(V)=3

## Via types
v1: diameter 50, hole 28, Top Layer to Bottom Layer, 31 vias
v2: diameter 300, hole 157, Top Layer to Bottom Layer, 4 vias

## Nets (pads, with @x,y where several pads share a name; then routed paths per layer and width w, separated by ;. In a path a pad name is that pad's centre, name@x,y a point inside that pad or via, vN(x,y) a via of type N, cw(c..) or ccw(c..) an arc to the next point about the centre after c; other vN are vias at no path point)
+5: 5v.1 R1.1 R2.1 R3.1 R4.1 R5.1 R6.1 R7.1 R8.1 R9.1 R10.1 R11.1 R12.1 R13.1 R14.1 R15.1 R16.1 R17.1 R18.1 R19.1 R20.1 R21.1 R22.1 R23.1 R24.1 R25.1 R26.1 R27.1 R28.1 R29.1 R30.1 R31.1 R33.1 R34.1 R35.1 R36.1 R37.1 R38.1 R39.1 R40.1 R41.1 R42.1 R43.1 R44.1 R45.1 R46.1 R47.1 R48.1 R49.1 R50.1 R51.1 R52.1 R58.1 R59.1 R60.1 R61.1 R62.1 R63.1 R64.1 R65.1 R66.1 R67.1 R68.1 R69.1 R70.1 R71.1 R72.1 R74.1 R75.1 R76.1 SW1.3 U1.4 U1.8 U2.16
C0: C0.1 R53.1 U2.3 | length 2552.4
  Top Layer w10: R53.1 5915.87,2125 v1(6045,2125) ; U2.3 v1(6655,3490)
  Top Layer w15: v1(6045,2125) 6050,2120 6050,1890 C0.1@6055,1885
  Bottom Layer w10: v1(6045,2125) 6565,2125 6865,2425 6865,3280 v1(6655,3490)
C1: C1.1@6381.67,1880 R54.1 U2.2 | length 2316
  Top Layer w10: R54.1 6075,3174.13 6215,3174.13 6325.87,3285 6595.43,3285 6705,3394.57 U2.2
  Top Layer w15: 6075,3174.13 6075,2390 6385,2080 C1.1@6385,1881.65
C2: C2.1@6218.33,1880 R82.1 U2.4 | length 3128.6
  Top Layer w10: R82.1 5255.83,3369.13 5309.96,3315 v1(5600,3315) 6525.43,3315 6605,3394.57 U2.4
  Top Layer w15: R82.1 R82.1@5250.87,3375 ; v1(5795,2785) 5795,2580 6218.33,2156.67 C2.1@6218.33,1880
  Bottom Layer w15: v1(5600,3315) 5600,2980 v1(5795,2785)
C3: C3.1 R55.1 U2.7 | length 1707.6
  Top Layer w10: R55.1 5919.13,3875 6035,3875 6455,3455 U2.7
  Top Layer w15: R55.1 5925.83,3879.13 6248.33,4201.64 C3.1
C4: C4.1 R56.1 U2.10 | length 2163.1
  Top Layer w10: R56.1 5915.87,4545 v1(6070,4545) ; v1(6455,3025) U2.10
  Top Layer w15: v1(6070,4545) 6070,4639.43 6110,4679.43 C4.1
  Bottom Layer w10: v1(6070,4545) 6070,3625 6455,3240 v1(6455,3025)
C5: C5.1 R57.1 U2.1 | length 5530.8
  Top Layer w10: R57.1 2974.13,4684.17 2993.74,4664.57 3070.43,4664.57 v1(3075,4660) ; U2.1 v1(6755,3490)
  Top Layer w15: C5.1 2800,4418.69 2800,4720 2860,4780 2925,4780 2961.14,4743.86 2961.14,4708 R57.1
  Bottom Layer w10: v1(3075,4660) 3080.86,4660 3100.86,4640 6100,4640 6755,3985 v1(6755,3490)
C6: C6.1 R78.1 U2.5 | length 4667.3
  Top Layer w10: R78.1 v1(3055,4010) ; v1(5975,3485) 5985,3485 6125,3345 6505.43,3345 6555,3394.57 U2.5
  Top Layer w15: C6.1 2581.25,4011.25 2705,4135 2920,4135 2974.13,4080.87 R78.1
  Bottom Layer w10: v1(3055,4010) 3060,4005 3060,3605 3180,3485 v1(5975,3485)
C7: C7.1 R81.1 U2.6 | length 4527.2
  Top Layer w10: v1(3290,3175.19) 3409.32,3175.19 R81.1 ; v1(6175,3430) 6327.84,3430 6389.1,3368.74 6479.17,3368.74 6505,3394.57 U2.6
  Top Layer w15: C7.1 2637.69,3827.5 v1(3290,3175.19)
  Bottom Layer w10: v1(3290,3175.19) 3290,3265 3455,3430 v1(6175,3430)
C8: C8.1 R79.1 U2.9 | length 5018.4
  Top Layer w10: R79.1 3010,3259.13 v1(3010,3180) ; v1(6405,3110) U2.9
  Top Layer w15: C8.1 2717.56,3643.75 2974.13,3387.18 R79.1
  Bottom Layer w10: v1(3010,3180) 3010,2625 3070,2565 5860,2565 v1(6405,3110)
C9: C9.1 R80.1 U2.11 | length 6225.3
  Top Layer w10: R80.1 2974.13,2285 2984.13,2295 3040,2239.13 v1(3040,2170) ; v1(6505,3110) U2.11
  Top Layer w15: C9.1 2576.31,2723.69 2952.03,2347.97 2952.03,2307.11 R80.1
  Bottom Layer w10: v1(3040,2170) 3040,1975 3115,1900 5740,1900 5840,2000 5840,2225 6145,2530 6450,2530 6505,2585 v1(6505,3110)
Clk: Clk.1 U1.3 U2.14 | length 1912.3
  Top Layer w10: Clk.1@6540,1864.51 6540,2045 6250,2335 6250,2810 6330,2890 6519.42,2890 6655.85,3026.44 ; U2.14 6655.85,3200.8 6655.85,3026.44 ; U1.3 6655.85,2852.07 6655.85,3026.44
GND: C1.2 C2.2 DS1.2 DS2.2 DS3.2 DS4.2 DS5.2 DS6.2 DS7.2 DS8.2 DS9.2 DS10.2 DS11.2 DS12.2 DS13.2 DS14.2 DS15.2 DS16.2 DS17.2 DS18.2 DS19.2 DS20.2 DS21.2 DS22.2 DS23.2 DS24.2 DS25.2 DS26.2 DS27.2 DS28.2 DS29.2 DS30.2 GND.1 J1.2 J1.3 Q1.2 Q2.2 Q3.2 Q4.2 Q5.2 Q6.2 Q7.2 Q8.2 Q9.2 Q10.2 U1.1 U2.8 U2.13 U2.15 | length 12432.3
  Top Layer w10: v1(2855,1950) 2855,2031.97 Q8.2 ; v1(2860,2960) 2860,3041.3 Q7.2 ; v1(2860,3675) 2860,3751.97 Q6.2 ; Q5.2 2860,4456.97 2885,4431.97 v1(2885,4360) ; DS25.2 3491.1,2351.1 3540,2400 ; DS19.2 3490,2627.23 3490,2450 3540,2400 ; DS7.2 3491.1,4133.9 v1@3465,4160 ; DS1.2 3491.1,4186.1 v1@3465,4160 ; v1(3530,3125) 3530,3207.52 Q9.2 ; DS26.2 3804.1,2339.55 3864.55,2400 ; DS20.2 3804.1,2460.45 3864.55,2400 ; DS8.2 3779.57,4046.19 3779.57,4080.43 3700,4160 ; DS2.2 3804.1,4264.1 3700,4160 ; DS27.2 4117.1,2354.82 4162.28,2400 ; DS3.2 4117.1,4262.1 4015,4160 ; DS28.2 4430.1,2370.1 4460,2400 ; DS4.2 4430.1,4265.1 4325,4160 ; DS29.2 4743.1,2338.1 4805,2400 ; DS23.2 4743.1,2461.9 4805,2400 ; DS11.2 4718.57,4046.19 4718.57,4076.43 4635,4160 ; DS5.2 4743.1,4268.1 4635,4160 ; v1(4965,3385) 5053.03,3385 5110,3328.03 Q10.2 ; DS24.2@5055,2627.23 DS24.2 5056.1,2438.9 5095,2400 ; DS30.2 5056.1,2361.1 5095,2400 ; DS12.2 4917.76,4160 ; DS6.2 5056.1,4298.34 4917.76,4160 ; Q1.2 5780,2093.03 v1(5780,2185) ; Q2.2 5780,3138.03 v1(5780,3230) ; Q3.2 5780,3848.7 v1(5780,3955) ; Q4.2 5780,4513.03 v1(5780,4600) ; C1.2 6345,2630.12 v1(6345,2740) ; v1(6350,3470) 6357.4,3470 6405,3422.4 6399.17,3416.57 6405,3410.74 U2.8 ; v1(6605,3110) 6604.6,3110.4 6604.6,3201.25 U2.13 ; U2.15 6704.6,3201.25 6704.6,3120.4 v1(6710,3115) 6763.57,3061.43 C2.2 6756.71,3008.13 U1.1 ; v1@3465,4160 3700,4160 ; 3540,2400 3864.55,2400 ; 3700,4160 4015,4160 ; 3864.55,2400 4162.28,2400 ; 4015,4160 4092.57,4082.43 4092.57,4046.19 DS9.2 DS13.2 DS15.2 DS17.2 DS21.2 4117.1,2445.18 4162.28,2400 ; 4015,4160 4325,4160 ; 4325,4160 4405.57,4079.43 4405.57,4046.19 DS10.2 DS14.2 DS16.2 DS18.2 DS22.2 4430.1,2429.9 4460,2400 ; 4325,4160 4635,4160 ; 4460,2400 4805,2400 ; 4635,4160 4917.76,4160 ; 4805,2400 5095,2400
  Top Layer w15: GND.1 6525,4372.73 6542.69,4355.04 J1.3
  other v1: 3450,4160
NetC1_1: C1.1@6455.12,2630 U1.5 | length 152.1
  Top Layer w10: C1.1@6455.12,2630 6456.34,2628.78 U1.5
NetC2_1: C2.1@6706.43,3015 R32.1 U1.2 U1.6 | length 579.9
  Top Layer w10: R32.1 6598.68,2493.86 6656.71,2551.89 U1.6 6656.71,2648.46 6706.71,2698.46 U1.2 6706.71,3014.72 C2.1@6706.43,3015
NetDS1_1: DS1.1 R1.2 | length 122.4
  Top Layer w10: DS1.1 3634.72,4364.17 R1.2
NetDS2_1: DS2.1 R2.2 | length 122.4
  Top Layer w10: DS2.1 3947.72,4364.17 R2.2
NetDS3_1: DS3.1 R3.2 | length 122.4
  Top Layer w10: DS3.1 4260.72,4364.17 R3.2
NetDS4_1: DS4.1 R4.2 | length 122.4
  Top Layer w10: DS4.1 4573.72,4364.17 R4.2
NetDS5_1: DS5.1 R5.2 | length 122.4
  Top Layer w10: DS5.1 4886.72,4364.17 R5.2
NetDS6_1: DS6.1 R6.2 | length 122.4
  Top Layer w10: DS6.1 5199.72,4364.17 R6.2
NetDS7_1: DS7.1 R7.2 | length 127
  Top Layer w10: DS7.1 3639.72,4010.84 R7.2
NetDS8_1: DS8.1 R8.2 | length 127
  Top Layer w10: DS8.1 3952.72,4010.84 R8.2
NetDS9_1: DS9.1 R9.2 | length 127
  Top Layer w10: DS9.1 4265.72,4010.84 R9.2
NetDS10_1: DS10.1 R10.2 | length 127
  Top Layer w10: DS10.1 4578.72,4010.84 R10.2
NetDS11_1: DS11.1 R11.2 | length 127
  Top Layer w10: DS11.1 4891.72,4010.84 R11.2
NetDS12_1: DS12.1 R12.2 | length 127
  Top Layer w10: DS12.1 5204.72,4010.84 R12.2
NetDS13_1: DS13.1 R13.2 | length 129.5
  Top Layer w10: DS13.1 4265.72,3662.5 R13.2
NetDS14_1: DS14.1 R14.2 | length 129.5
  Top Layer w10: DS14.1 4578.72,3662.5 R14.2
NetDS15_1: DS15.1 R15.2 | length 132
  Top Layer w10: DS15.1 4265.72,3314.17 R15.2
NetDS16_1: DS16.1 R16.2 | length 132
  Top Layer w10: DS16.1 4578.72,3314.17 R16.2
NetDS17_1: DS17.1 R17.2 | length 134.5
  Top Layer w10: DS17.1 4265.72,2965.84 R17.2
NetDS18_1: DS18.1 R18.2 | length 134.5
  Top Layer w10: DS18.1 4578.72,2965.84 R18.2
NetDS19_1: DS19.1 R19.2 | length 137
  Top Layer w10: DS19.1 3639.72,2617.5 R19.2
NetDS20_1: DS20.1 R20.2 | length 137
  Top Layer w10: DS20.1 3952.72,2617.5 R20.2
NetDS21_1: DS21.1 R21.2 | length 137
  Top Layer w10: DS21.1 4265.72,2617.5 R21.2
NetDS22_1: DS22.1 R22.2 | length 137
  Top Layer w10: DS22.1 4578.72,2617.5 R22.2
NetDS23_1: DS23.1 R23.2 | length 137
  Top Layer w10: DS23.1 4880.89,2506.66 R23.2
NetDS24_1: DS24.1 R24.2 | length 137
  Top Layer w10: DS24.1 5204.72,2617.5 R24.2
NetDS25_1: DS25.1 R25.2 | length 139.5
  Top Layer w10: DS25.1 3639.72,2269.17 R25.2
NetDS26_1: DS26.1 R26.2 | length 139.5
  Top Layer w10: DS26.1 3952.72,2269.17 R26.2
NetDS27_1: DS27.1 R27.2 | length 139.5
  Top Layer w10: DS27.1 4265.72,2269.17 R27.2
NetDS28_1: DS28.1 R28.2 | length 139.5
  Top Layer w10: DS28.1 4578.72,2269.17 R28.2
NetDS29_1: DS29.1 R29.2 | length 139.5
  Top Layer w10: DS29.1 4891.72,2269.17 R29.2
NetDS30_1: DS30.1 R30.2 | length 139.5
  Top Layer w10: DS30.1 5204.72,2269.17 R30.2
NetDS31_1: DS31.1 R31.2 | length 144.5
  Top Layer w10: DS31.1 4578.72,1964.17 R31.2
NetDS31_2: DS31.2 DS32.2 DS33.2 DS34.2 Q1.3 | length 1641.8
  Top Layer w10: DS31.2 4510.1,2055 4820,2055 ; DS32.2 4820,2051.9 4820,2055 ; DS33.2 5136.1,2055 ; DS34.2 5456.1,2055 ; Q1.3 5456.1,2055 ; 4820,2055 5136.1,2055 ; 5136.1,2055 5456.1,2055
NetDS32_1: DS32.1 R34.2 | length 145.5
  Top Layer w10: DS32.1 4894.06,1961.84 R34.2
NetDS33_1: DS33.1 R35.2 | length 146.4
  Top Layer w10: DS33.1 5209.39,1959.5 R35.2
NetDS34_1: DS34.1 R36.2 | length 144.5
  Top Layer w10: DS34.1 5524.72,1964.17 R36.2
NetDS35_1: DS35.1 R37.2 | length 139.5
  Top Layer w10: DS35.1 5524.72,2269.17 R37.2
NetDS35_2: DS35.2 DS36.2 DS37.2 DS38.2 Q2.3 | length 1954.5
  Top Layer w10: DS38.2 5179.44,3100 5360,3100 ; DS35.2 5351.57,2304.52 5351.57,2333.43 5280,2405 5280,2780 ; DS36.2 5376.1,2683.9 5280,2780 ; DS37.2 5499.44,3100 ; Q2.3 5499.44,3100 ; 5280,2780 5280,3020 5360,3100 ; 5360,3100 5499.44,3100
NetDS36_1: DS36.1 R38.2 | length 137
  Top Layer w10: DS36.1 5524.72,2617.5 R38.2
NetDS37_1: DS37.1 R39.2 | length 134.5
  Top Layer w10: DS37.1 5524.72,2965.84 R39.2
NetDS38_1: DS38.1 R40.2 | length 134.5
  Top Layer w10: DS38.1 5204.72,2965.84 R40.2
NetDS39_1: DS39.1 R41.2 | length 129.5
  Top Layer w10: DS39.1 5204.72,3662.5 R41.2
NetDS39_2: DS39.2 DS40.2 DS41.2 DS42.2 Q3.3 | length 1623.3
  Top Layer w10: DS39.2 5193.44,3810.67 5280,3810.67 ; DS40.2 5513.44,3810.67 ; DS41.2 5297.77,4100 5280,4100 ; DS42.2 5280,4273.89 5280,4100 ; Q3.3 5513.44,3810.67 ; 5280,3810.67 5280,4100 ; 5280,3810.67 5513.44,3810.67
NetDS40_1: DS40.1 R42.2 | length 129.5
  Top Layer w10: DS40.1 5524.72,3662.5 R42.2
NetDS41_1: DS41.1 R43.2 | length 127
  Top Layer w10: DS41.1 5524.72,4010.84 R43.2
NetDS42_1: DS42.1 R44.2 | length 124.5
  Top Layer w10: DS42.1 5524.72,4359.17 R44.2
NetDS43_1: DS43.1 R45.2 | length 124.5
  Top Layer w10: DS43.1 5524.72,4704.17 R45.2
NetDS43_2: DS43.2 DS44.2 DS45.2 DS46.2 Q4.3 | length 2275.3
  Top Layer w10: DS46.2 4430,4714.9 4430,4540 4495,4475 4805,4475 ; DS45.2 4743.1,4536.9 4805,4475 ; DS44.2 5056.1,4548.9 5130,4475 ; DS43.2 5376.1,4538.9 5440,4475 ; Q4.3 5440,4475 ; 4805,4475 5130,4475 ; 5130,4475 5440,4475
NetDS44_1: DS44.1 R46.2 | length 124.5
  Top Layer w10: DS44.1 5204.72,4704.17 R46.2
NetDS45_1: DS45.1 R47.2 | length 124.5
  Top Layer w10: DS45.1 4891.72,4704.17 R47.2
NetDS46_1: DS46.1 R48.2 | length 124.5
  Top Layer w10: DS46.1 4578.72,4704.17 R48.2
NetDS47_1: DS47.1 R49.2 | length 124.5
  Top Layer w10: DS47.1 4265.72,4704.17 R49.2
NetDS47_2: DS47.2 DS48.2 DS49.2 DS50.2 Q5.3 | length 2145.1
  Top Layer w10: Q5.3 3050,4495 ; DS50.2 3176.1,4621.1 3050,4495 ; DS49.2 3491.1,4616.1 3370,4495 ; DS48.2 3804.1,4589.1 3710,4495 ; DS47.2 4105,4702.9 4105,4575 4025,4495 3710,4495 ; 3050,4495 3370,4495 ; 3370,4495 3710,4495
NetDS48_1: DS48.1 R50.2 | length 124.5
  Top Layer w10: DS48.1 3952.72,4704.17 R50.2
NetDS49_1: DS49.1 R51.2 | length 124.5
  Top Layer w10: DS49.1 3639.72,4704.17 R51.2
NetDS50_1: DS50.1 R52.2 | length 124.5
  Top Layer w10: DS50.1 3324.72,4704.17 R52.2
NetDS51_1: DS51.1 R58.2 | length 124.5
  Top Layer w10: DS51.1 3324.72,4359.17 R58.2
NetDS51_2: DS51.2 DS52.2 DS53.2 DS54.2 Q6.3 | length 1620.3
  Top Layer w10: Q6.3 3059.43,3790 ; DS53.2 3059.43,3790 ; DS52.2 3176.1,4076.1 3230,4130 ; DS51.2 3175,4368.89 3175,4185 3230,4130 ; DS54.2 3374.43,3790 ; 3059.43,3790 3374.43,3790 ; 3230,4130 3335,4130 3374.43,4090.57 3374.43,3790
NetDS52_1: DS52.1 R59.2 | length 127
  Top Layer w10: DS52.1 3324.72,4010.84 R59.2
NetDS53_1: DS53.1 R60.2 | length 129.5
  Top Layer w10: DS53.1 3324.72,3662.5 R60.2
NetDS54_1: DS54.1 R61.2 | length 129.5
  Top Layer w10: DS54.1 3639.72,3662.5 R61.2
NetDS55_1: DS55.1 R62.2 | length 134.5
  Top Layer w10: DS55.1 3639.72,2965.84 R62.2
NetDS55_2: DS55.2 DS56.2 DS57.2 DS58.2 Q7.3 | length 1726.5
  Top Layer w10: Q7.3 3073.44,3079.33 ; DS58.2 3073.44,2382.66 3073.44,2731 ; DS57.2 3073.44,2731 ; DS56.2 3073.44,3079.33 ; DS55.2 3388.43,3079.33 3073.44,3079.33 ; 3073.44,2731 3073.44,3079.33
NetDS56_1: DS56.1 R63.2 | length 134.5
  Top Layer w10: DS56.1 3324.72,2965.84 R63.2
NetDS57_1: DS57.1 R64.2 | length 137
  Top Layer w10: DS57.1 3324.72,2617.5 R64.2
NetDS58_1: DS58.1 R65.2 | length 139.5
  Top Layer w10: DS58.1 3324.72,2269.17 R65.2
NetDS59_1: DS59.1 R66.2 | length 144.5
  Top Layer w10: DS59.1 3313.9,1845.83 R66.2
NetDS59_2: DS59.2 DS60.2 DS61.2 DS62.2 Q8.3 | length 1631.4
  Top Layer w10: Q8.3 3105,2075 ; DS59.2 3151.57,1999.53 3151.57,2028.43 3105,2075 ; DS60.2 3391.1,2075 ; DS61.2 3704.1,2075 ; DS62.2 4017.1,2075 3704.1,2075 ; 3105,2075 3391.1,2075 ; 3391.1,2075 3704.1,2075
NetDS60_1: DS60.1 R67.2 | length 144.5
  Top Layer w10: DS60.1 3639.72,1964.17 R67.2
NetDS61_1: DS61.1 R68.2 | length 144.5
  Top Layer w10: DS61.1 3952.72,1964.17 R68.2
NetDS62_1: DS62.1 R69.2 | length 144.5
  Top Layer w10: DS62.1 4265.72,1964.17 R69.2
NetDS63_1: DS63.1 R70.2 | length 129.5
  Top Layer w10: DS63.1 3952.72,3662.5 R70.2
NetDS63_2: DS63.2 DS64.2 DS65.2 Q9.3 | length 874.1
  Top Layer w10: Q9.3 3729.1,3250 ; DS65.2 3729.1,3051.66 3729.1,3250 ; DS63.2 DS64.2 3729.1,3250
NetDS64_1: DS64.1 R71.2 | length 132
  Top Layer w10: DS64.1 3952.72,3314.17 R71.2
NetDS65_1: DS65.1 R72.2 | length 134.5
  Top Layer w10: DS65.1 3952.72,2965.84 R72.2
NetDS67_1: DS67.1 R74.2 | length 134.5
  Top Layer w10: DS67.1 4891.72,2965.84 R74.2
NetDS67_2: DS67.2 DS68.2 DS69.2 Q10.3 | length 1130.5
  Top Layer w10: DS67.2 4743.1,3018.1 4790,3065 ; DS69.2 DS68.2 4743.1,3111.9 4790,3065 ; Q10.3 5030.63,3185.63 4930,3085 4810,3085 4790,3065
NetDS68_1: DS68.1 R75.2 | length 132
  Top Layer w10: DS68.1 4891.72,3314.17 R75.2
NetDS69_1: DS69.1 R76.2 | length 129.5
  Top Layer w10: DS69.1 4891.72,3662.5 R76.2
NetF1_1: F1.1 J1.1 | length 380.2
  Top Layer w15: F1.1@6155.49,3905.18 6374.37,4124.06 J1.1@6445,4124.06
NetF1_2: F1.2 SW1.1 | length 572.4
  Top Layer w10: 6633.5,3781.5 6633.5,3776.5 6668.45,3741.55 SW1.1@6673.45,3741.55
  Top Layer w15: F1.2 6550.18,3864.82 6633.5,3781.5
NetQ1_1: Q1.1 R53.2 | length 136.3
  Top Layer w10: Q1.1 5781.1,2015.87 R53.2
NetQ2_1: Q2.1 R54.2 | length 137
  Top Layer w10: Q2.1 5782.64,3065.87 R54.2
NetQ3_1: Q3.1 R55.2 | length 136.6
  Top Layer w10: Q3.1 5781.77,3770.87 R55.2
NetQ4_1: Q4.1 R56.2 | length 136.3
  Top Layer w10: Q4.1 5781.1,4435.87 R56.2
NetQ5_1: Q5.1 R57.2 | length 167.2
  Top Layer w10: Q5.1 2865.87,4537.64 R57.2 R57.2@2867.6,4696.73
NetQ6_1: Q6.1 R78.2 | length 184.8
  Top Layer w10: Q6.1 2865.87,3832.64 R78.2
NetQ7_1: Q7.1 R79.2 | length 184.1
  Top Layer w10: Q7.1@2858.03,3114.13 Q7.1 2865.87,3121.97 R79.2
NetQ8_1: Q8.1 R80.2 | length 181.1
  Top Layer w10: Q8.1@2858.66,2112.4 Q8.1 2858.9,2114.13 2860.87,2116.1 R80.2
NetQ9_1: Q9.1 R81.2 | length 126.4
  Top Layer w10: R81.2 3531.81,3284.13 Q9.1
NetQ10_1: Q10.1 R82.2 | length 139.1
  Top Layer w10: Q10.1 5117.64,3260.87 R82.2
NetR32_2: R32.2 R33.2 U1.7 | length 331
  Top Layer w10: R33.2 6705,2478.17 R32.2 6706.71,2483.54 U1.7
pads on no net: U2.12
copper on no net:
  other v2: 6805,1925 2620,1935 2620,4630 6805,4630

## Polygon pours and split planes (outlines as drawn)
+5 on Top Layer "+5_L01_P001" (solid, pour order 1): 2420,4835 2420,1720 7000,1720 7000,4835
GND on Bottom Layer "GND" (solid, pour order 2): 2420,4835 2420,1720 6995,1720 6995,4835

## Silkscreen, mask and mechanical layers (free items; w line width, h text height)
Top Overlay:
  text "Merry Christmas!" at 5660.91,4281.4 h31.5
  text "By Jake Hafele" at 5660.91,4206.4 h31.5
Mechanical 1:
  lines w10: 2420,1720 3600,1720 5820,1720 7000,1720 7000,4835 2420,4835 2420,4010 2420,2680 2420,1720